# Altium PCB kijek2.PcbDoc
Units mil, origin at the board's own origin, x right, y up, seen from the top; angles counter-clockwise.
Board outline 3346.46 x 826.77 mil, 2 copper layers (Top Layer, Bottom Layer); 70 components, 60 nets, 278 pads, 80 vias.
Unrouted connection lines stored in the file: 1.
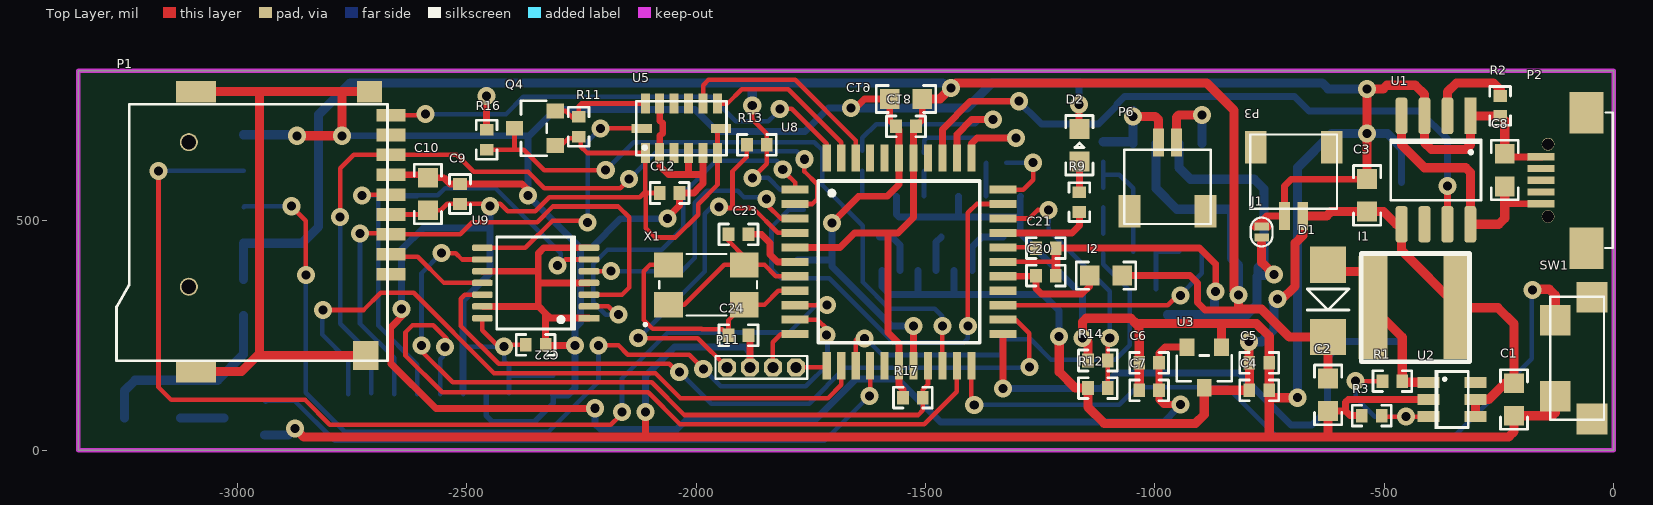
[diagram p0: Top Layer view]
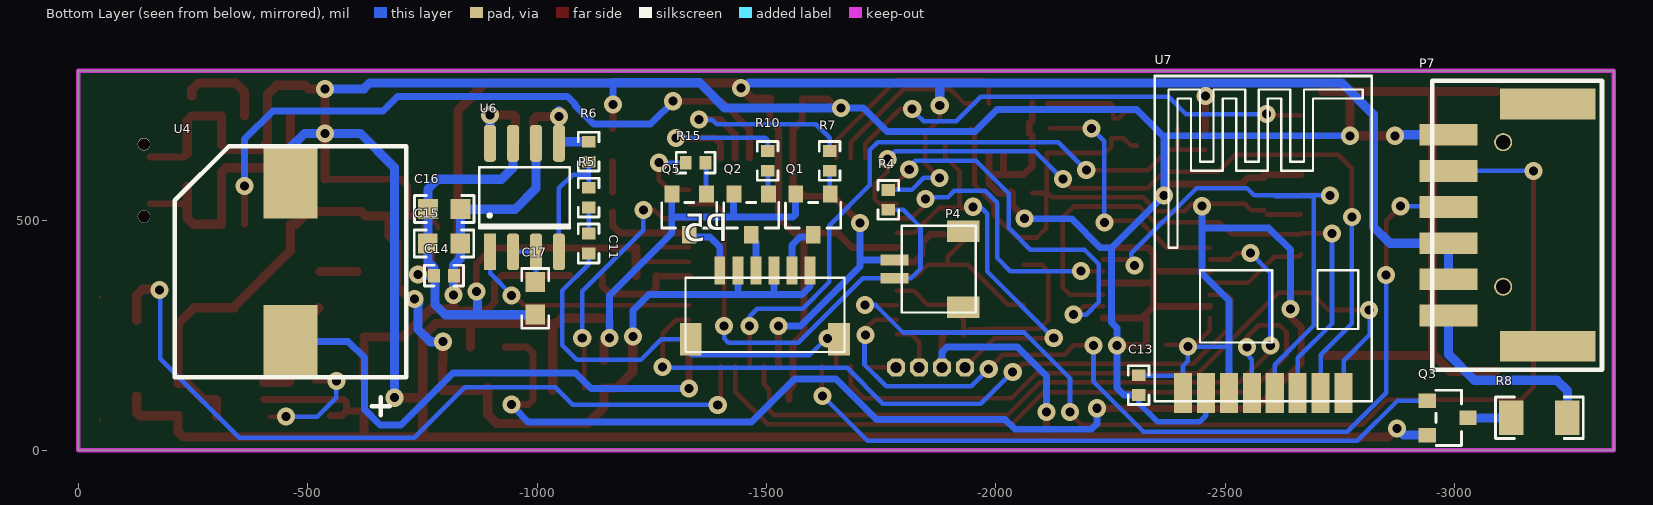
[diagram p1: Bottom Layer view, seen from below]

## Layer stack, top to bottom
Top Layer: signal copper 1.4
Dielectric: dielectric 12.6, FR-4, Dk 4.8
Bottom Layer: signal copper 1.4

## Board outline
-3346.46,0 -3346.46,826.77 0,826.77 0,0

## Design rules (kind name [scope] priority, off if disabled: settings)
Clearance [All] p1: gap=10
MinimumSolderMaskSliver [All] p1: minsoldermaskwidth=1
PolygonConnect [All] p1: connectstyle=Relief reliefconductorwidth=10 reliefentries=4 polygonreliefangle="90 Angle" airgapwidth=10
RoutingVias [All] p1: holewidth=19.68 width=39.37 viastyle="Through Hole" minholewidth=19.68 minwidth=39.37 maxholewidth=28 maxwidth=50
SolderMaskExpansion [All] p1: expansion=4
Width [All] p1: maxlimit=20 minlimit=10 preferedwidth=10
27 further rules are at their usual default settings.

## Components (designator, comment, footprint, x,y, rotation, side; value= is the part's Value field where it differs from the comment)
C1 "22uF" C0603 -217.56,110.32 r270 top
C2 "22uF" C0603 -622.56,120.32 r270 top
C3 "4,7uF" C0603 -537.56,555.1 r90 top
C4 "1uF" C0402 -772.56,130.32 r0 top
C5 "100nF" C0402 -772.56,190.32 r0 top
C6 "100nF" C0402 -1012.56,190.32 r180 top
C7 "1uF" C0402 -1012.56,130.32 r180 top
C8 "4,7uF" C0603 -237.56,610.32 r90 top
C9 "100nF" C0402 -2514.41,558.19 r90 top
C10 "10uF" C0603 -2584.41,558.19 r90 top
C11 "470nF" C0402 -1112.56,450.32 r90 bottom
C12 "100nF" C0402 -2057.56,560.32 r0 top
C13 "100nF" C0402 -2311.02,141.73 r270 bottom
C14 "100nF" C0402 -797.13,380.32 r0 bottom
C15 "10uF" C0603 -797.13,450.32 r0 bottom
C16 "10uF" C0603 -797.56,525.32 r0 bottom
C17 "4,7uF" C0603 -996.06,330.71 r270 bottom
C18 "100nF" C0402 -1542.56,705.32 r180 top
C19 "4,7uF" C0603 -1542.56,765.32 r180 top
C20 "100nF" C0402 -1237.56,380.31 r180 top
C21 "100nF" C0402 -1237.56,440.31 r0 top
C22 "100nF" C0402 -2349.49,229.29 r0 top
C23 "22pF" C0402 -1907.56,470.31 r180 top
C24 "22pF" C0402 -1907.56,250.31 r0 top
D1 "SS34" SMA -622.56,325.32 r90 top
D2 "BLUE" LED0603 -1164.56,664.32 r270 top
I1 "22uH" 6x6x2.8mm -432.56,310.32 r180 top
I2 "10uH" I0603 -1106.56,380.32 r180 top
J1 "SOLDER_JUMPER" SOLDER_JUMPER -767.56,475.32 r90 top
P1 "MICROSD" MICROSD -2664.41,340.32 r0 top
P2 "USB" MICRO_USB_2 -59.56,440.32 r90 top
P3 "A1001WR-S-2P" A1001WR-S-2P -697.56,585.32 r180 top
P4 "LIGHT" A1001WR-S-2P -1853.56,394.32 r90 bottom
P5 "MOTORS" A1001WR-S-6P -1496.56,316.32 r0 bottom
P6 "A1001WR-S-2P" A1001WR-S-2P -972.56,595.32 r0 top
P7 "CON" MX-502352-0600 -3094.41,490.32 r90 bottom
P11 "DEBUG" PAD_4-1 -1857.56,180.31 r0 top
Q1 "BC847B" SOT23 -1601.56,513.8 r0 bottom
Q2 "BC847B" SOT23 -1466.56,513.8 r0 bottom
Q3 "2N7002" SOT23 -2984.41,70.32 r270 bottom
Q4 "2N7002" SOT23 -2351.3,701.38 r90 top
Q5 "BC847B" SOT23 -1331.56,513.8 r0 bottom
R1 "100K" R0402 -482.56,150.32 r180 top
R2 "1K2" R0402 -247.56,750.32 r90 top
R3 "15K" R0402 -527.56,75.32 r180 top
R4 "10k" R0402 -1765.56,545.32 r90 bottom
R5 "20K" R0402 -1112.56,550.32 r90 bottom
R6 "20K" R0402 -1112.56,650.32 r90 bottom
R7 "9K6" R0402 -1637.56,630.32 r90 bottom
R8 "16R" R1206 -3184.41,70.32 r0 bottom
R9 "4K7" R0402 -1164.56,540.32 r270 top
R10 "9K6" R0402 -1502.56,630.32 r90 bottom
R11 "4K7" R0402 -2255.91,704.72 r90 top
R12 "1M" R0402 -1124.21,135.32 r180 top
R13 "10K" R0402 -1867.56,665.32 r180 top
R14 "1M" R0402 -1124.21,195.32 r180 top
R15 "9K6" R0402 -1345.56,626.32 r0 bottom
R16 "4K7" R0402 -2456.3,676.38 r270 top
R17 "4K7" R0402 -1527.56,114.17 r0 top
SW1 "SW_3x6x3.5mm" 3x6x3.5mm -87.56,200.32 r270 top
U1 "TP4056" SO-8 -387.56,610.32 r270 top
U2 "MT3608" SOT-23-6 -352.56,110.32 r270 top
U3 "XC6206" SOT23 -892.56,180.32 r180 top
U4 "SMB07" SMB07 -462.56,410.32 r90 bottom
U5 "ADXL345" LGA_CC-14 -2031.93,701.38 r90 top
U6 "LM4871" SO-8 -972.56,550.32 r90 bottom
U7 "NRF24L01" NRF24L01 -2582.56,124.32 r90 bottom
U8 "ATmega644" TQFP-44A -1557.56,410.32 r0 top
U9 "74LCV125" TSSOP-14 -2349.49,364.29 r180 top
X1 "18,432MHz" CFPX-104 -1977.56,360.31 r0 top

## Footprints (in the part's own frame and the unit in brackets; to place one, negate y for a bottom-side part, rotate by r counter-clockwise, add the part's x,y. Pads: shape width x height; smd on the part's side, far side on the other; paste and mask are expansions set on the pad)
3x6x3.5mm [mm]
  rect 1.7x1.7 smd: 1(-2.1,-1.016) 2(2.1,-1.016) 3(-3.37,1.016) 3(3.37,1.016)
  Top Layer lines w0.127: 3.4,1.016 3.37,1.016 ; -3.37,1.016 -3.4,1.016
  silkscreen extent -3.4,-1.3 3.4,1.68, body extent -3.9,-1.1 3.9,2.5, height 3.5
6x6x2.8mm [mm]
  rect 1.6x5.7 smd: 1(-2.35,0) 2(2.35,0)
  silkscreen extent -3,-3 3,3, body extent -3,-3 3,3, height 2.8
A1001WR-S-2P [mm]
  rect 0.6x1.55 smd: 1(-0.5,1.9) 2(0.5,1.9)
  rect 1.2x1.8 smd: 3(-2.1,-1.9) 3(2.1,-1.9)
  silkscreen extent -2.4,-2.6 2.4,1.5, body extent -2.46,-2.66 2.46,1.56, height 2.9
A1001WR-S-6P [mm]
  rect 1.2x1.8 smd: 0(-4.1,1.9) 0(4.1,1.9)
  rect 0.6x1.55 smd: 1(-2.5,-1.9) 2(-1.5,-1.9) 3(-0.5,-1.9) 4(0.5,-1.9) 5(1.5,-1.9) 6(2.5,-1.9)
  silkscreen extent -4.4,-1.5 4.4,2.6, body extent -4.46,-1.56 4.4,2.66, height 2.9
C0402 [mm] "Chip Resistor, Body 1.0x0.5mm, IPC Low Density"
  rect 0.65x0.75 smd: 1(-0.55,0) 2(0.55,0)
  silkscreen extent -1.07,-0.58 1.07,0.58, body extent -0.52,-0.28 0.53,0.28, height 0.4
C0603 [mm] "Chip Resistor, Body 1.6x0.8mm, IPC Low Density"
  rect 1.1x1.1 smd: 1(-0.9,0) 2(0.9,0)
  silkscreen extent -1.65,-0.75 1.65,0.75, body extent -0.85,-0.47 0.85,0.47, height 0.6
CFPX-104 [mm]
  rect 1.6x1.4 smd: 1(-2.1,-1.1) 1(2.1,1.1) 2(-2.1,1.1) 2(2.1,-1.1)
  silkscreen extent -3.45,-2.28 2.8,1.7, body extent -2.5,-1.6 2.5,1.6, height 1
I0603 [mm] "Chip Resistor, Body 1.6x0.8mm, IPC Low Density"
  rect 1.1x1.1 smd: 1(-0.9,0) 2(0.9,0)
  silkscreen extent -1.65,-0.75 1.65,0.75, body extent -0.85,-0.47 0.85,0.47, height 0.6
LED0603 [mm] "Chip Diode Led, Body 1.6x0.8mm, IPC Low Density"
  rect 1.1x1.1 smd: 1(-0.9,0) 2(0.9,0)
  silkscreen extent -1.65,-0.75 1.65,0.75, body extent -0.85,-0.47 0.85,0.47, height 0.6
LGA_CC-14 [mm]
  rect 1.118x0.5 smd mask+0.025: 1(-1.371,2) 2(-1.371,1.2) 3(-1.371,0.4) 4(-1.371,-0.4) 5(-1.371,-1.2) 6(-1.371,-2) 8(1.371,-2) 9(1.371,-1.2) 10(1.371,-0.4) 11(1.371,0.4) 12(1.371,1.2) 13(1.371,2)
  rect 0.5x1.118 smd mask+0.025: 7(0,-2.2) 14(0,2.2)
  silkscreen extent -1.5,-2.5 1.5,2.5, body extent -1.58,-2.58 1.58,2.58, height 1
MICRO_USB_2 [mm]
  rect 2.3x1.9 smd: 0(0,0) 0(7.5,0)
  rect 0.4x1.5 smd: 1(2.45,2.525) 2(3.1,2.525) 3(3.75,2.525) 4(4.4,2.525) 5(5.05,2.525)
  round 0.7 hole 0.65: 6(1.75,2.125) 7(5.75,2.125)
  silkscreen extent 0,-1.45 7.5,-1.02, body extent -0.29,-2.73 7.79,2.83, height 2.77
MICROSD [mm]
  rect 1.6x0.7 smd: 1(0,1.1) 2(0,2.2) 3(0,3.3) 4(0,4.4) 5(0,5.5) 6(0,6.6) 7(0,7.7) 8(0,8.8) 9(0,9.9)
  rect 2.2x1.2 smd: 10(-10.8,-4.3) 10(-10.8,11.2)
  rect 1.4x1.6 smd: 10(-1.4,-3.4)
  rect 1.4x1.2 smd: 10(-1.2,11.2)
  round 1 hole 0.8: 14(-11.2,0.4) 14(-11.2,8.4)
  silkscreen extent -15.2,-3.7 -0.2,10.5, body extent -15.2,-3.7 -0.2,10.5, height 1.7
MX-502352-0600 [mm]
  rect 1.7x5.3 smd: 0(-6.7,-2.75) 0(6.7,-2.75)
  rect 1.2x3.2 smd: 1(5,2.75) 2(3,2.75) 3(1,2.75) 4(-1,2.75) 5(-3,2.75) 6(-5,2.75)
  silkscreen extent -8,-5.75 8,3.65, body extent -8.13,-5.88 8.13,3.78, height 6.4
NRF24L01 [mm]
  rect 2.2x1 smd: 1(0,4.445) 2(0,3.175) 3(0,1.905) 4(0,0.635) 5(0,-0.635) 6(0,-1.905) 7(0,-3.175) 8(0,-4.445)
  silkscreen extent -0.45,-6 17.55,6, body extent -0.53,-6.08 17.63,6.08, height 1.85
PAD_4-1 [mm]
  oct 1x1 hole 0.6: 1(-1.905,0) 2(-0.635,0) 3(0.635,0) 4(1.905,0)
  silkscreen extent -2.54,-0.64 2.54,0.64
R0402 [mm] "Chip Resistor, Body 1.0x0.5mm, IPC Low Density"
  rect 0.65x0.75 smd: 1(-0.55,0) 2(0.55,0)
  silkscreen extent -1.07,-0.58 1.07,0.58, body extent -0.52,-0.28 0.53,0.28, height 0.4
R1206 [mm] "Chip Resistor, Body 3.2x1.6mm, IPC Low Density"
  rect 1.35x1.9 smd: 1(-1.55,0) 2(1.55,0)
  silkscreen extent -2.42,-1.15 2.42,1.15, body extent -1.67,-0.87 1.67,0.87, height 0.75
SMA [mil]
  rect 79x79 smd: 1(-78.87,0) 2(78.87,0)
  silkscreen extent -20,-46 26,46, body extent -98,-53 98,53, height 87
SMB07 [mm]
  rect 4x3 smd: 1(-4.4,0) 2(4.4,0)
  silkscreen extent -8.5,-6.4 6.4,6.4, body extent -6.4,-6.4 6.4,6.4, height 6.5
SO-8 [mil]
  rect 80x26 smd: 1(-118.11,75)
  rrect50% 80x26 smd: 2(-118.11,25) 3(-118.11,-25) 4(-118.11,-75) 5(118.11,-75) 6(118.11,-25) 7(118.11,25) 8(118.11,75)
  silkscreen extent -66,-98 66,98, body extent -121,-96 121,96, height 68
SOLDER_JUMPER [mm]
  rect 0.45x0.8 smd: 1(0.3,0) 2(-0.3,0)
  Top Layer lines w0.254: 0.2,0.4 cw(c0.2,0) 0.6,0.008 cw(c0.2,0) 0.6,0 cw(c0.2,0) 0.3,-0.387 cw(c0.2,0) 0.2,-0.4
  silkscreen extent -0.8,-0.6 0.8,0.6
SOT23 [mil]
  rect 32x38 smd: 1(-37.6,-44.33) 2(37.6,-44.33) 3(0,44.33)
  silkscreen extent -60,-26 60,30, body extent -57,-49 57,48, height 40
SOT-23-6 [mm]
  rect 0.6x1.2 smd: 1(-0.95,-1.3) 2(0,-1.3) 3(0.95,-1.3) 4(0.95,1.3) 5(0,1.3) 6(-0.95,1.3)
  silkscreen extent -1.63,-0.98 1.62,0.9, body extent -1.5,-1.5 1.5,1.5, height 1.3
TQFP-44A [mm] "QFP; 44 Leads; Body 10 x 10 mm; Pitch 0.8 mm"
  rect 1.5x0.45 smd: 1(-5.75,4) 2(-5.75,3.2) 3(-5.75,2.4) 4(-5.75,1.6) 5(-5.75,0.8) 6(-5.75,0) 7(-5.75,-0.8) 8(-5.75,-1.6) 9(-5.75,-2.4) 10(-5.75,-3.2) 11(-5.75,-4) 23(5.75,-4) 24(5.75,-3.2) 25(5.75,-2.4) 26(5.75,-1.6) 27(5.75,-0.8) 28(5.75,0) 29(5.75,0.8) 30(5.75,1.6) 31(5.75,2.4) 32(5.75,3.2) 33(5.75,4)
  rect 0.45x1.5 smd: 12(-4,-5.75) 13(-3.2,-5.75) 14(-2.4,-5.75) 15(-1.6,-5.75) 16(-0.8,-5.75) 17(0,-5.75) 18(0.8,-5.75) 19(1.6,-5.75) 20(2.4,-5.75) 21(3.2,-5.75) 22(4,-5.75) 34(4,5.75) 35(3.2,5.75) 36(2.4,5.75) 37(1.6,5.75) 38(0.8,5.75) 39(0,5.75) 40(-0.8,5.75) 41(-1.6,5.75) 42(-2.4,5.75) 43(-3.2,5.75) 44(-4,5.75)
  silkscreen extent -4.47,-4.47 4.48,4.48, body extent -6,-6 6,6, height 1.1
TSSOP-14 [mil]
  rect 45x14 smd: 1(-116.14,76.77)
  rrect50% 45x14 smd: 2(-116.14,51.18) 3(-116.14,25.59) 4(-116.14,0) 5(-116.14,-25.59) 6(-116.14,-51.18) 7(-116.14,-76.77) 8(116.14,-76.77) 9(116.14,-51.18) 10(116.14,-25.59) 11(116.14,0) 12(116.14,25.59) 13(116.14,51.18) 14(116.14,76.77)
  silkscreen extent -87,-100 85,100, body extent -126,-100 126,100, height 47

## Part data
C1 C2 C3 C4 C5 C6 C7 C8 C9 C10 C11 C12 C13 C14 C15 C16 C17 C18 C19 C20 C21 C22 C23 C24: library part Cap, "Capacitor"
D1: library part Diode
D2: library part LED_BLUE, "LED"
I1 I2: library part Inductor
J1 P3 P6: "Header, 2-Pin"
P2: library part USB_2.0
P4: library part A1001WR-S-2P, "Header, 2-Pin"
P5 P7: library part "Header 6", "Header, 6-Pin"
P11: library part "Header 4", "Header, 4-Pin"
Q1 Q2 Q5: library part BC847C(BEC), "NPN"
Q3 Q4: library part 2N7002(GSD), "N-MOSFET"
R1 R2 R3 R4 R5 R6 R7 R8 R9 R10 R11 R12 R13 R14 R15 R16 R17: library part Res, "Resistor"
U4: library part BUZ_SMB07
U8: "TQFP - 44pin / MLF - 44pin"
U9: "BUFFERS (3-STATE)"
X1: library part Crystal

## Via types
v1: diameter 39.37, hole 19.68, Top Layer to Bottom Layer, 80 vias

## Nets (pads, with @x,y where several pads share a name; then routed paths per layer and width w, separated by ;. In a path a pad name is that pad's centre, name@x,y a point inside that pad or via, vN(x,y) a via of type N, cw(c..) or ccw(c..) an arc to the next point about the centre after c; other vN are vias at no path point)
3V3: C6.1 C7.1 C9.1 C10.1 C12.1 C13.1 C22.1 P1.4 Q4.1 R11.1 U3.2 U5.1 U5.6 U5.7 U7.1 U7.3 U9.14 | length 4845
  Top Layer w10: P1.4 C10.1@-2590.55,513.54 ; C10.1 -2555.98,522.76 -2542.2,536.54 C9.1 -2426.3,536.54 -2410.2,520.43 -2350.73,520.43 -2320.29,550.87 -2123.12,550.87 -2113.67,560.32 C12.1 -2107.67,560.32 -2110.67,563.32 U5.1 -2237.33,647.41 -2251.3,661.38 -2251.3,679.72 -2277.95,679.72 -2293.9,663.78 Q4.1 ; U9.14 -2465.63,260.91 -2434.02,229.29 C22.1 ; -2109.56,560.32 -2109.56,483.32 -2089.56,463.32 -2045.56,463.32 -1995.56,513.32 -1995.56,535.95 -1953.19,578.32 U5.6 -1953.19,693.5 U5.7
  Top Layer w15: v1(-2641.73,307.09) -2633.86,299.21 -2665.35,267.72 -2665.35,188.98 -2566.93,90.55 -2219.78,90.55 v1(-2220.47,91.24) ; v1(-944.56,99.32) -980.91,99.32 -990.91,109.32 C7.1 C6.1 -990.91,211.97 -978.23,224.64 U3.2
  Bottom Layer w10: U7.3@-2507.68,122.05 U7.3@-2507.68,132.32 ; -2507.68,225.32 -2507.64,225.35 v1(-2418.39,225.35) -2418.39,194.14 -2407.56,183.32 U7.1@-2407.56,162.32 ; U7.1 U7.1@-2407.56,162.32 ; C13.1@-2311.02,162.32 U7.1@-2407.56,162.32
  Bottom Layer w15: v1(-2641.73,307.09) -2641.73,437.01 -2594.49,484.25 -2448.82,484.25 ; U7.3@-2507.68,132.32 -2507.68,225.32 -2507.68,326.46 -2448.82,385.32 -2448.82,484.25 ; v1(-2448.82,531.5) -2448.82,484.25 ; v1(-2220.47,91.24) -2220.47,57.23 -2208.73,45.49 -2041.44,45.49 -2020,66.93 -1739.94,66.93 -1651.58,155.3 -1561.44,155.3 -1467.38,61.24 -980.63,61.24 -950.56,91.32 v1@-934.56,91.32
5V: C2.1 C14.1 C15.1 C16.1 C18.1 C19.1 D1.1 I2.1 P7.4 P7.5 R4.2 R13.1 R16.1 R17.1 U6.6 U8.5 U8.17 U8.38 | length 5535.4
  Top Layer w10: v1(-1877.56,751.32) -1877.56,721.32 -1845.91,689.66 R13.1 -1845.91,623.97 v1(-1876.56,593.32)
  Top Layer w15: R16.1 v1(-2456.3,771.38) ; U8.5 -1686.06,441.81 -1654.57,473.31 -1581.56,473.31 ; R17.1@-1549.21,110.31 -1549.21,131.97 -1557.56,140.31 U8.17 -1557.56,232.31 -1581.56,256.32 -1581.56,473.31 ; C19.1 -1507.13,719.09 C18.1 -1526.06,700.16 U8.38 -1526.06,506.8 -1559.56,473.31 -1581.56,473.31 ; I2.1 -923.56,380.31 -907.37,364.13 -907.37,321.91 ; -907.56,321.73 -891.03,305.2 -793.23,305.2
  Top Layer w20: C19.1 -1468.56,765.32 -1433.56,800.32 -887.56,800.32 -827.56,740.32 -827.56,347.76 v1(-817.56,337.76) -817.56,307.2 -767.7,307.2 -706.95,246.44 D1.1 ; C2.1 D1.1@-622.56,231.44
  Bottom Layer w10: v1(-1876.56,593.32) -1842.51,593.32 -1816.16,566.97 R4.2
  Bottom Layer w15: v1(-2456.3,771.38) -2456.3,799.32
  Bottom Layer w20: P7.5 P7.4 -2858.78,450.95 -2822.56,487.17 -2822.56,731.32 -2753.56,800.32 -1878.56,800.32 ; v1(-1877.56,751.32) -1877.56,799.32 -1878.56,800.32 ; -1462.56,800.32 -1878.56,800.32 ; U6.6 -997.56,570.31 -952.13,524.88 C16.1@-832.99,524.88 ; C16.1 C16.1@-832.99,524.88 ; v1(-817.56,337.76) -817.56,402.88 -832.99,418.32 C16.1@-832.99,524.88
  other v1: -1444.56,789.32
AGND: C14.2 C15.2 C16.2 C17.2 C20.1 C21.2 J1.2 U6.7 U8.28 | length 1491.2
  Top Layer w10: U8.28 -1215.91,410.32
  Top Layer w15: C21.2 -902.56,440.31 -867.56,405.32 v1(-867.56,345.32) v1@-867.56,337.17
  Top Layer w20: C20.1 C21.2 ; -767.56,451.69 -767.56,409.32 v1(-740.56,382.32)
  Bottom Layer w20: -972.56,294.88 -870.08,294.88 ; U6.7 -947.56,615.31 -922.56,590.32 -783.56,590.32 -762.13,568.88 C16.2 -762.13,410.75 -775.47,397.4 C14.2 ; v1(-867.56,345.32) -870.08,342.8 -870.08,294.88 ; v1@-742.56,380.32 C14.2 ; -870.08,294.88 -799.99,294.88 -777.87,317 -777.87,349.38 -777.24,350.01 -777.24,378.54 C14.2
BAT: C1.1 C3.1 C4.1 C5.1 I1.1 P3.1 P5.1 P5.3 P5.5 R12.2 U1.5 U2.4 U2.5 U3.3 | length 2575.9
  Top Layer w20: v1(-1208.67,248.03) -1208.67,170.42 -1173.56,135.32 R12.2 -1145.87,93.62 -1110.56,58.32 -911.56,58.32 -892.56,77.32 U3.3 ; U3.3@-886.89,130.32 C4.1 C5.1 -795.28,191.38 v1(-795.28,236.22) ; v1(-732.56,329.32) -734.56,329.32 -738.19,332.94 -738.19,325.94 -737.56,325.32 -726.72,325.32 -694.56,357.48 -694.56,451.11 -677.87,467.8 P3.1 -625.36,510.51 -616.21,519.67 C3.1 -501.56,519.67 -474.1,492.2 U1.5 -462.56,435.31 -340.04,312.8 I1.1 -252.56,310.32 -217.56,275.31 C1.1 -237.13,145.75 -272.56,110.32 U2.5 U2.4
  Bottom Layer w15: P5.1 -1594.98,356.74 -1577.61,339.37 -1517.5,339.37 ; P5.3 -1516.24,340.63 -1517.5,339.37 ; P5.5 -1437.5,339.37 ; v1(-1208.67,248.03) -1208.67,304.42 -1243.61,339.37 -1437.5,339.37 ; -1517.5,339.37 -1437.5,339.37
  Bottom Layer w20: v1(-795.28,236.22) -767.72,236.22 -740.17,263.77 -740.17,317.92 -742.56,320.32 -737.56,325.32 -738.19,325.94 -738.19,332.94 -734.56,329.32 v1(-732.56,329.32)
GND: C1.2 C2.2 C3.2 C4.2 C5.2 C6.2 C7.2 C8.2 C9.2 C10.2 C12.2 C13.2 C18.2 C19.2 C22.2 C23.1 C24.2 D2.1 J1.1 P1.6 P1.10 P2.5 P3.2 P4.2 P7.1 P11.2 Q1.2 Q2.2 Q3.2 Q5.2 R2.1 R3.2 R14.2 SW1.2 U1.1 U1.3 U2.2 U3.1 U4.2 U5.2 U5.4 U5.5 U5.12 U7.2 U8.6 U8.18 U8.39 U9.1 U9.4 U9.7 U9.10 U9.13 | length 15373.5
  Top Layer w15: P1.6 C10.2@-2584.41,600.16 ; C10.2 -2549.84,593.62 -2536.06,579.84 C9.2 -2379.06,579.84 v1@-2360.24,561.02 ; U9.13 -2345.67,313.11 -2344.49,314.29 ; U9.10 -2343.9,389.88 ; v1(-2263.78,228.35) -2326.89,228.35 C22.2 -2327.83,297.64 ; U9.1 -2317.72,287.52 -2327.83,297.64 ; U9.4 -2343.9,364.29 ; U9.7 -2331.81,441.06 -2343.9,428.98 -2343.9,389.88 ; -2110.56,34.06 v1@-2110.56,82.67 ; v1(-2110.24,82.67) v1@-2110.56,82.67 ; U5.12 -2079.17,718.6 -2072.56,711.99 -2072.56,690.77 -2079.17,684.15 U5.2 -2078.25,646.48 -2078.25,618.11 -2060.46,600.32 -1984.69,600.32 ; v1(-2062.56,504.32) -2062.56,506.66 -2035.91,533.32 C12.2 -2004.69,560.32 -1998.74,566.26 -1998.74,567 -1984.69,581.06 -1984.69,600.32 ; C12.2@-2032.37,563.85 C12.2@-2031.5,562.99 ; -2016.18,603.94 U5.4 ; U5.5 -1984.69,600.32 ; C24.2 -1882.56,246.97 P11.2 ; C23.1 -1857.56,470.31 -1838.56,451.32 -1838.56,426.32 -1822.56,410.32 U8.6 ; v1(-1703.56,495.32) -1645.74,553.13 -1583.74,553.13 -1557.56,579.32 U8.39 -1557.56,698.66 C18.2 -1577.99,719.09 C19.2 -1632.56,765.32 -1652.56,745.32 v1(-1662.56,745.32) ; U8.18 v1(-1526.06,270.82) ; v1(-1165.56,753.32) -1165.56,701.97 D2.1@-1164.56,700.97 ; R14.2 R14.2@-1145.67,195.51 ; -767.56,498.94 -767.56,499.51 -756.56,510.51 P3.2 -717.24,575.63 -702.56,590.32 -537.78,590.32 C3.2 ; C2.2 -584.56,84.88 ; R3.2 -574.99,75.32 -584.56,84.88 ; U2.2 -578.56,110.32 -584.56,104.32 -584.56,84.88 ; R2.1@-247.32,728.43 R2.1@-237.56,718.66 ; C8.2 -230.95,639.13 P2.5@-156.97,639.13 ; -2343.9,364.29 -2343.9,313.7 -2327.83,297.64 ; -2343.9,364.29 -2343.9,389.88 ; v1@-2110.56,82.67 -2110.56,90.22 -2118.11,82.67 v1@-2110.56,82.67
  Top Layer w20: P1.10@-3089.61,171.02 -2990.85,171.02 -2955.42,206.46 P1.10@-2719.53,206.46 ; P1.10@-3089.61,781.26 P1.10@-2711.65,781.26 ; -2951.56,211.46 -2951.56,781.26 ; v1(-2873.56,47.32) -2854.56,28.32 -229.56,28.32 ; v1(-2870.08,685.04) v1(-2771.65,685.04) -2771.65,777.32 ; v1(-1157.48,244.09) -1157.48,279.53 -1149.69,287.32 -1052.56,287.32 -1041.15,275.91 ; R14.2@-1145.67,195.51 v1@-1145.67,236.22 ; C7.2 C6.2 -1034.21,248.66 -1034.56,248.32 -1034.56,269.32 -1041.15,275.91 ; U3.1 -854.96,274.31 -856.56,275.91 ; -750.91,29.32 C4.2 ; v1(-688.98,114.17) -750.91,114.17 C4.2 ; -622.56,35.32 C2.2 ; C3.2 v1(-537.56,690.32) v1(-537.56,787.32) -502.56,787.32 -494.56,795.32 -432.56,795.32 -412.56,775.31 U1.3 -412.56,670.31 -397.56,655.32 -322.56,655.32 -312.56,665.32 U1.1 R2.1@-247.32,728.43 ; C8.2 R2.1@-237.56,718.66 ; -227.56,30.32 -217.56,40.32 C1.2 -133.99,74.88 -127.56,81.32 SW1.2 ; -1041.15,275.91 -856.56,275.91 ; -856.56,275.91 -778.84,275.91 -750.91,247.97 C5.2 C4.2
  Bottom Layer w12: U7.2@-2457.68,122.05 -2457.68,75.79 -2444.2,62.32 -2351.56,62.32 -2311.02,102.85 C13.2
  Bottom Layer w15: v1(-2771.65,685.04) -2363.72,685.04 ; C13.2 -2278.8,120.08 -2263.78,135.09 v1(-2263.78,228.35) -2263.78,266.5 -2251.97,278.32 -2251.97,440.94 ; v1(-2110.24,82.67) -2110.24,161.41 -2047.24,224.41 -1893.7,224.41 -1882.56,213.27 P11.2 ; v1(-2062.56,504.32) -2164.56,504.32 -2227.93,440.94 -2251.97,440.94 ; P4.2 -1704.24,414 -1704.24,400.82 -1703.56,400.13 ; v1(-1703.56,495.32) -1703.56,400.13 ; v1(-1662.56,745.32) -1711.56,745.32 -1762.74,694.13 -1954.37,694.13 -2002.68,742.44 -2306.33,742.44 -2363.72,685.04 ; Q1.2@-1562.96,553.13 -1562.96,513.72 -1557.56,508.32 -1426.56,508.32 ; v1(-1526.06,270.82) -1574.24,270.82 -1703.56,400.13 ; Q2.2@-1427.96,553.13 -1427.96,509.72 -1426.56,508.32 ; Q5.2@-1292.96,553.13 -1293.56,553.13 -1293.56,508.32 ; v1(-1165.56,753.32) -1165.56,800.58 ; v1(-1157.48,244.09) -1157.48,337.24 -1293.56,473.32 -1293.56,508.32 ; U4.2 U4.2@-462.56,659.41 ; -2363.72,685.04 -2366.14,682.62 v1(-2366.14,555.12) -2251.97,440.94 ; -1426.56,508.32 -1293.56,508.32
  Bottom Layer w20: P7.1 -2872.21,687.17 v1(-2870.08,685.04) ; Q3.2 -2888.54,32.72 ; v1(-1662.56,745.32) -1409.56,745.32 -1354.29,800.58 -1165.56,800.58 ; -1165.56,800.32 -635.56,800.32 -622.56,787.32 v1(-537.56,787.32) ; v1(-688.98,114.17) -688.98,615.9 -614.56,690.32 v1(-537.56,690.32) -493.46,690.32 U4.2@-462.56,659.41
NetC8_1: C8.1 P2.1 U1.4 U1.8 | length 582.3
  Top Layer w15: -236.1,536.77 P2.1@-156.97,536.77
  Top Layer w20: U1.4 -462.56,665.31 -412.56,615.32 -322.56,615.32 -312.56,605.32 -312.56,580.32 U1.8 -250.67,492.2 -237.56,505.31 -237.56,535.32 ; C8.1 -237.56,535.32 ; -236.1,536.77 -237.56,535.32
NetC11_1: C11.1 P5.0 U8.14 | length 972.7
  Top Layer w10: U8.14 -1652.05,239.83 -1639.91,251.97 v1@-1621.85,251.97
  Bottom Layer w10: v1(-1632.56,243.32) -1630.51,243.32 -1594.51,207.32 -1335.56,207.32 -1335.14,207.73 -1335.14,241.51 -1270.76,241.51 -1226.56,197.32 -1086.15,197.32 -1055.12,228.35 -1055.12,347.87 -1112.56,405.32 C11.1
NetC11_2: C11.2 R5.1 | length 56.7
  Bottom Layer w10: C11.2 R5.1
NetC17_1: C17.1 U6.2 U6.3 | length 131.5
  Bottom Layer w10: C17.1@-997.56,350.75 U6.3 U6.2
NetC20_2: C20.2 I2.2 U8.27 | length 250.6
  Top Layer w15: U8.27 C20.2@-1260.71,378.82 ; C20.2 -1259.21,351.97 -1247.56,340.32 -1159.56,340.32 -1141.99,357.88 I2.2
NetC21_1: C21.1 U8.29 | length 70.5
  Top Layer w10: U8.29 C21.1@-1260.71,441.81
NetC23_2: C23.2 U8.7 X1.1 | length 403.4
  Top Layer w10: X1.1@-2060.24,317.01 -2025.51,317.01 -1938.9,403.62 X1.1@-1894.88,403.62 ; C23.2 -1929.21,455.97 -1894.88,421.64 X1.1@-1894.88,403.62 ; U8.7 -1826.06,378.82 -1850.87,403.62 X1.1@-1894.88,403.62
NetC24_1: C24.1 U8.8 X1.2 | length 569.1
  Top Layer w10: X1.2@-2060.24,403.62 -2100.32,403.62 -2114.17,389.76 -2114.17,283.46 -2094.8,264.09 -1988.05,264.09 -1987.74,263.78 -1942.68,263.78 C24.1 -1929.21,282.68 -1894.88,317.01 -1850.87,317.01 -1820.55,347.32 U8.8
NetD1_2: D1.2 I1.2 R1.1 U2.1 | length 324.8
  Top Layer w20: D1.2@-607.56,389.19 I1.2@-527.56,389.19 ; I1.2 -460.91,246.14 R1.1 -458.31,147.72 U2.1
NetD2_2: D2.2 R9.1 | length 66.9
  Top Layer w15: R9.1 D2.2
NetP1_2: P1.2 U9.11 | length 224.7
  Top Layer w10: P1.2 -2658.74,421.26 -2606.3,421.26 -2549.33,364.29 U9.11
NetP1_3: P1.3 U7.6 U9.3 | length 1250.8
  Top Layer w10: v1(-2732.28,472.44) -2666.61,472.44 P1.3 -2514.02,470.24 -2487.87,496.38 -2346.5,496.38 -2312.01,530.87 -2169.29,530.87 -2145.67,507.24 -2145.67,354.33 -2161.3,338.7 U9.3
  Bottom Layer w10: v1(-2732.28,472.44) -2732.28,275.59 -2657.68,200.98 U7.6@-2657.68,122.05
NetP1_5: P1.5 U7.5 U9.6 | length 1206.8
  Top Layer w10: v1(-2728.35,555.12) -2726.61,556.85 P1.5 ; v1@-2295.28,405.51 -2285.32,415.47 U9.6
  Bottom Layer w10: v1(-2728.35,555.12) -2606.3,555.12 ; U7.5@-2607.68,122.05 -2607.68,186.42 -2692.91,271.65 -2692.91,553.74 -2607.68,553.74 -2606.3,555.12 ; v1@-2295.28,405.51 -2295.28,429.13 -2437.01,570.87 -2547.01,570.87 -2562.76,555.12 -2606.3,555.12
  other v1: -2301.56,402.32
NetP1_7: P1.7 U7.7 U8.2 | length 1783.9
  Top Layer w10: v1(-2775.59,507.87) -2775.59,614.17 -2746.3,643.46 P1.7 -2521.42,643.46 -2484.25,606.3 -2366.14,606.3 -2330.71,570.87 -2165.35,570.87 v1(-2145.67,590.55) ; U8.2 -1747.17,536.3 -1736.22,547.24 -1736.22,579.68 -1763.78,607.24 v1(-1763.78,633.86)
  Bottom Layer w10: v1(-2775.59,507.87) -2775.59,275.59 -2707.68,207.68 U7.7@-2707.68,124.32 ; v1@-2149.61,586.61 v1(-2145.67,590.55) -2085.22,651 -1780.92,651 -1771.65,641.73 -1779.53,633.86 v1(-1763.78,633.86)
NetP1_9: P1.9 U8.44 | length 1089.7
  Top Layer w10: P1.9 -2592.28,730.08 v1(-2590.08,732.28) ; v1(-1817.56,743.32) -1825.56,743.32 -1826.34,744.09 -1791.34,744.09 -1715.04,667.8 U8.44
  Bottom Layer w10: v1(-2590.08,732.28) -2414.22,732.28 -2376.18,770.32 -1967.17,770.32 -1913.48,716.63 -1842.43,716.63 -1827.56,731.5 -1827.56,745.32 -1825.56,743.32 v1(-1817.56,743.32)
NetP4_1: P4.1 R4.1 U8.32 | length 1033.1
  Top Layer w10: v1(-1407.56,270.32) -1407.56,517.32 -1388.57,536.3 U8.32
  Bottom Layer w10: R4.1 -1798.21,523.66 -1835.56,486.32 -1835.56,395.32 -1814.87,374.63 P4.1 -1709.87,374.63 -1569.56,234.32 -1416.56,234.32 -1407.56,243.32 v1(-1407.56,270.32)
NetP5_2: P5.2 Q1.3 | length 108.3
  Bottom Layer w15: Q1.3@-1600.56,464.48 -1572.72,464.48 -1555.61,447.37 P5.2
NetP5_4: P5.4 Q2.3 | length 78
  Bottom Layer w15: P5.4 -1476.87,453.16 Q2.3@-1465.56,464.48
NetP5_6: P5.6 Q5.3 | length 128.2
  Bottom Layer w15: P5.6 -1398.13,442.74 -1376.4,464.48 Q5.3@-1330.56,464.48
NetP6_1: P6.1 R6.2 U6.5 | length 259.6
  Top Layer w20: v1(-1047.56,727.32) -999.56,727.32 -992.24,720 P6.1
  Bottom Layer w20: R6.2 -1051.1,671.97 U6.5 -1047.56,740.31 v1(-1047.56,727.32)
NetP6_2: P6.2 U6.8 | length 194.3
  Top Layer w20: P6.2 -952.87,725 -947.56,730.32 v1(-897.56,730.32)
  Bottom Layer w20: U6.8 -897.56,740.31 v1(-897.56,730.32)
NetP7_2: P7.2 U8.9 | length 2395.3
  Top Layer w10: v1(-3171.45,608.43) -3171.56,608.32 -3171.56,137.32 -3143.56,109.32 -2851.97,109.32 -2797.97,55.32 -2185.56,55.32 -2165.71,75.16 -2173.22,82.67 v1(-2161.42,82.67) ; U8.9 v1@-1719.07,315.83
  Bottom Layer w10: v1(-3171.45,608.43) P7.2 ; v1(-2161.42,82.67) -2173.22,82.67 -2161.42,94.48 -2161.42,156.46 -2061.56,256.32 -1797.56,256.32 -1737.56,316.32 v1(-1714.56,316.32)
NetP7_3: P7.3 U8.10 | length 2030.8
  Top Layer w10: v1(-2881.89,531.5) -2850.39,500 v1(-2850.39,381.89) ; v1(-2212.6,228.34) -2168.99,228.34 -2148.56,207.91 -2015,207.91 v1(-1984.25,177.17) ; U8.10 -1735.63,284.33 -1715.56,264.26 v1(-1715.56,251.32)
  Bottom Layer w10: P7.3 -2984.33,531.5 v1(-2881.89,531.5) ; v1(-2850.39,381.89) -2850.39,125.15 -2765.56,40.32 -2321.56,40.32 -2212.6,149.28 v1@-2212.6,212.6 ; v1(-1984.25,177.17) -1946.4,139.32 -1760.56,139.32 -1713.56,186.32 v1@-1713.56,266.32
NetP7_6: P7.6 R8.1 | length 436
  Bottom Layer w20: R8.1 -3245.43,129.29 -3222.41,152.32 -3042.41,152.32 -2986.14,208.58 P7.6
NetP11_1: P11.1 R13.2 U8.4 | length 962.6
  Top Layer w10: v1@-2129.92,244.09 -1996.34,244.09 P11.1 ; v1@-1941.56,543.32 -1941.56,528.32 -1940.91,527.66 -1920.56,527.66 ; R13.2 -1889.21,638.66 -1920.56,607.32 -1920.56,527.66 ; U8.4 -1821.6,473.31 -1875.96,527.66 -1920.56,527.66
  Bottom Layer w10: v1(-2125.98,244.09) -1980.76,389.32 -1980.76,515.11 -1963.56,532.32 -1939.56,532.32 v1@-1938.56,531.32 ; v1(-1949.56,530.32) -1945.56,530.32 -1944.56,529.32 -1939.56,529.32 v1@-1938.56,530.32
NetP11_3: P11.3 U8.11 | length 115
  Top Layer w10: P11.3@-1822.56,180.31 -1832.56,190.31 -1832.56,235.31 -1815.04,252.83 U8.11
NetP11_4: P11.4 U8.12 | length 53.9
  Top Layer w10: P11.4@-1772.56,180.31 U8.12@-1718.66,180.31
NetQ1_1: Q1.1 R7.1 | length 55.8
  Bottom Layer w10: Q1.1@-1638.16,553.13 -1637.56,553.73 R7.1
NetQ2_1: Q2.1 R10.1 | length 56.6
  Bottom Layer w10: Q2.1@-1502.56,553.73 -1503.16,553.13 -1503.16,608.06 R10.1
NetQ3_1: Q3.1 U8.15 | length 1476.7
  Top Layer w10: v1@-1622.05,106.61 v1(-1622.05,118.11) -1620.55,119.61 U8.15
  Bottom Layer w10: Q3.1@-2937.48,105.32 Q3.1 -2875.16,107.91 -2787.24,20 -1720.16,20 v1(-1622.05,118.11)
NetQ3_3: Q3.3 R8.2 | length 94.6
  Bottom Layer w20: R8.2 Q3.3
NetQ4_2: Q4.2 R11.2 U5.13 | length 228.7
  Top Layer w10: Q4.2 -2283.9,738.98 -2267.95,723.03 R11.2@-2255.91,723.03 ; R11.2 -2255.91,749.97 -2250.52,755.35 U5.13
NetQ4_3: Q4.3 R16.2 U8.20 | length 1465.6
  Top Layer w10: R16.2 -2395.56,654.72 -2395.63,654.79 ; Q4.3 -2395.63,654.79 ; v1(-2196.85,610.24) -2330.71,610.24 -2375.26,654.79 -2395.63,654.79 ; U8.20 v1(-1463.07,270.83)
  Bottom Layer w10: v1(-2196.85,610.24) -2135.77,671.32 -1742.18,671.32 -1724.56,653.69 -1724.56,577.32 -1636.56,489.32 -1636.56,366.32 -1578.56,308.32 -1479.58,308.32 -1463.07,291.8 v1(-1463.07,270.83)
NetQ5_1: Q5.1 R15.1 | length 73.6
  Bottom Layer w10: Q5.1@-1368.16,553.13 -1368.16,625.37 R15.1
NetR1_2: R1.2 R3.1 U2.3 | length 286.3
  Top Layer w10: v1@-552.56,150.32 R1.2@-514.21,150.32 ; R3.1@-503.5,72.91 v1(-452.56,72.91) U2.3@-418.74,72.91
  Bottom Layer w10: v1(-562.56,150.32) -562.56,114.32 -521.16,72.91 v1(-452.56,72.91)
NetR2_2: R2.2 U1.2 | length 194.7
  Top Layer w20: U1.2 -362.56,780.32 -342.56,800.32 -262.56,800.32 -247.56,785.32 R2.2
NetR5_2: R5.2 R6.1 U6.4 | length 272.2
  Bottom Layer w10: R5.2 -1112.56,600.32 ; R6.1 -1112.56,600.32 ; U6.4 -1047.56,570.31 -1077.56,600.32 -1112.56,600.32
NetR7_2: R7.2 U8.35 | length 473.8
  Top Layer w15: U8.35 -1431.57,688.3 -1399.56,720.32 v1(-1352.56,720.32)
  Bottom Layer w10: R7.2 -1637.56,680.32 -1607.56,710.32 -1391.56,710.32 -1381.56,720.32 v1(-1352.56,720.32)
NetR9_2: R9.2 U8.30 | length 202.6
  Top Layer w15: U8.30 -1180.57,473.31 -1164.56,489.32 R9.2
NetR10_2: R10.2 U8.34 | length 358.2
  Top Layer w15: U8.34 -1400.08,667.8 -1387.56,680.32 v1@-1307.56,680.32
  Bottom Layer w10: R10.2@-1503.56,647.97 R10.2@-1503.56,651.97 ; R10.2 -1502.56,675.32 -1497.56,680.32 v1(-1302.56,680.32)
NetR12_1: R12.1 R14.1 U8.31 | length 552.1
  Top Layer w10: U8.31 -1274.02,504.8 -1255.51,523.32 v1(-1231.56,523.32) ; R12.1 R14.1 -1102.56,239.96 v1(-1098.43,244.09)
  Bottom Layer w10: v1(-1231.56,523.32) -1231.56,479.32 -1098.43,346.18 v1(-1098.43,244.09)
NetR15_2: R15.2 U8.33 | length 169.9
  Top Layer w10: U8.33 -1287.08,567.8 -1265.56,589.32 v1(-1265.56,626.32)
  Bottom Layer w10: R15.2 v1(-1265.56,626.32)
NetR17_2: R17.2 U8.19 U9.9 | length 1582.8
  Top Layer w10: v1(-2598.43,228.34) -2598.43,215.8 -2530.54,147.91 -2096.73,147.91 -2025.37,76.56 -1515.96,76.56 -1505.91,86.61 R17.2 -1505.91,131.97 -1494.57,143.31 U8.19 ; v1(-2555.12,429.13) -2523.62,429.13 -2509.96,415.47 U9.9
  Bottom Layer w10: v1(-2598.43,228.34) -2598.43,385.82 v1(-2555.12,429.13)
NetSW1_1: SW1.1 U8.22 | length 1737.1
  Top Layer w10: U8.22 -1400.08,104.8 v1(-1393.7,98.43)
  Top Layer w20: v1(-177.56,349.32) -176.48,350.39 -140.64,350.39 -127.56,337.31 SW1.1
  Bottom Layer w10: v1(-1393.7,98.43) -1193.64,98.43 -1193.32,98.74 -1078.13,98.74 -1039.56,137.32 -842.56,137.32 -732.17,26.93 -351.02,26.93 -178.56,199.39 -178.56,361.44 -166.43,349.32 v1(-177.56,349.32)
NetU1_7: U1.7 U8.36 | length 1451.4
  Top Layer w15: U8.36 -1463.07,698.8 -1401.56,760.32 v1(-1296.56,760.32) ; U1.7 v1(-362.56,575.32)
  Bottom Layer w15: v1@-1305.06,762.82 -1302.56,765.32 -1247.56,710.32 -1122.56,710.32 -1082.24,750.63 -1082.24,754.68 -1066.61,770.32 -695.51,770.32 -664.51,739.32 -424.35,739.32 -362.56,677.52 -362.56,595.31
NetU4_1: U4.1 U8.23 | length 1189.6
  Top Layer w15: U8.23 -1331.18,154.02 -1330.71,153.54 v1(-1330.71,133.86)
  Bottom Layer w15: v1(-1330.71,133.86) -1118.02,133.86 -1083.56,168.32 -816.56,168.32 -703.36,55.12 -657.48,55.12 -623.56,89.04 -623.56,201.32 -587.79,237.09 U4.1
NetU5_8: U5.8 U8.43 | length 365.1
  Top Layer w10: U5.8 -1931.58,755.35 -1900.15,786.77 -1799.02,786.77 -1683.54,671.3 U8.43
NetU5_9: U5.9 U8.42 | length 470
  Top Layer w10: U5.9 -1984.69,795.08 -1972.99,806.77 -1784.02,806.77 -1652.05,674.8 U8.42
NetU5_14: U5.14 U9.8 | length 562
  Top Layer w10: U9.8 -2371.81,441.06 -2312.87,500 -2240.17,500 v1(-2236.23,496.06) ; v1(-2208.66,700.79) -2208.07,701.38 U5.14
  Bottom Layer w10: v1(-2236.23,496.06) -2236.23,618.11 -2236.22,673.23 v1(-2208.66,700.79)
NetU6_1: U6.1 U8.25 | length 523.1
  Top Layer w10: U8.25 -972.33,315.83 -950.84,337.32 -944.56,331.03 v1(-944.56,337.32)
  Bottom Layer w10: v1@-948.53,334.64 -897.56,385.61 U6.1
NetU7_4: U7.4 U8.21 | length 1612.1
  Top Layer w10: v1@-2543.33,224.4 -2543.33,242.67 -2572.63,271.97 -2618.02,271.97 -2633.11,256.87 -2633.11,205.87 -2553.23,125.98 -2104.5,125.98 -2035.07,56.56 -1502.32,56.56 -1431.57,127.3 U8.21
  Bottom Layer w10: U7.4@-2557.68,122.05 -2557.68,198.23 -2551.18,204.72
  other v1: -2547.25,224.4
NetU7_8: U7.8 U8.13 | length 1501
  Top Layer w10: v1(-2812.56,305.32) -2724.76,305.32 -2687.56,342.52 -2614.9,342.52 -2440.29,167.91 -2088.45,167.91 -2033.85,113.32 -1712.56,113.32 -1683.54,142.33 U8.13
  Bottom Layer w10: v1(-2812.56,305.32) -2814.96,302.91 -2814.96,251.97 -2757.68,194.69 U7.8@-2757.68,122.05
NetU8_1: U8.1 U9.2 | length 838.5
  Top Layer w10: U9.2 -2191.06,313.11 v1@-2169.29,291.34 ; v1(-1811.08,611.34) -1803.33,603.59 -1803.33,602.54 -1783.94,583.15 U8.1
  Bottom Layer w10: v1(-2169.29,295.28) -2196.85,295.28 -2224.41,322.83 -2224.41,405.51 -2192.91,437.01 -2074.87,437.01 -2027.56,484.32 -2027.56,559.32 -1956.56,630.32 -1824.56,630.32 -1811.08,616.84 v1(-1811.08,611.34)
NetU8_3: U8.3 U9.5 | length 637.7
  Top Layer w10: U9.5 v1(-2185.16,389.88) ; v1@-1842.52,550.55 -1842.52,531.5 -1815.83,504.8 U8.3
  Bottom Layer w10: v1(-2185.16,389.88) -2031.38,389.88 -2002.56,418.7 -2002.56,539.32 -1976.56,565.32 -1909.56,565.32 -1895.43,551.18 -1843.15,551.18 -1844.02,550.32 -1848.56,550.32 -1846.56,548.32 v1(-1846.56,547.32)
NetU8_24: U8.24 U9.12 | length 1610.7
  Top Layer w10: U9.12 -2503.82,338.7 -2512.56,329.96 -2512.56,270.48 -2430,187.91 -2057.99,187.91 v1@-2035.43,165.35 ; U8.24 -1303.08,284.33 -1273.56,254.81 v1(-1273.56,181.32)
  Bottom Layer w10: v1@-2047.24,173.23 -2038.47,173.23 -1966.56,101.32 -1753.56,101.32 -1675.56,179.32 -1275.56,179.32 v1(-1273.56,181.32)
  other v1: -2036.56,170.32
pads on no net: P1.1 P1.8 P1.14 P2.0 P2.2 P2.3 P2.4 P2.6 P2.7 P3.3 P4.3 P6.3 P7.0 SW1.3 U1.6 U2.6 U5.3 U5.10 U5.11 U8.16 U8.26 U8.37 U8.40 U8.41

## Keep-outs
Keep-Out Layer:
  lines w10: -2362.2,0 0,0 ; 0,0 -3346.46,0 -3346.46,826.77 0,826.77 0,0